# EAGLE board PLC.63001-Silo-Medium (EAGLE 9.6.2), part 1 of 2
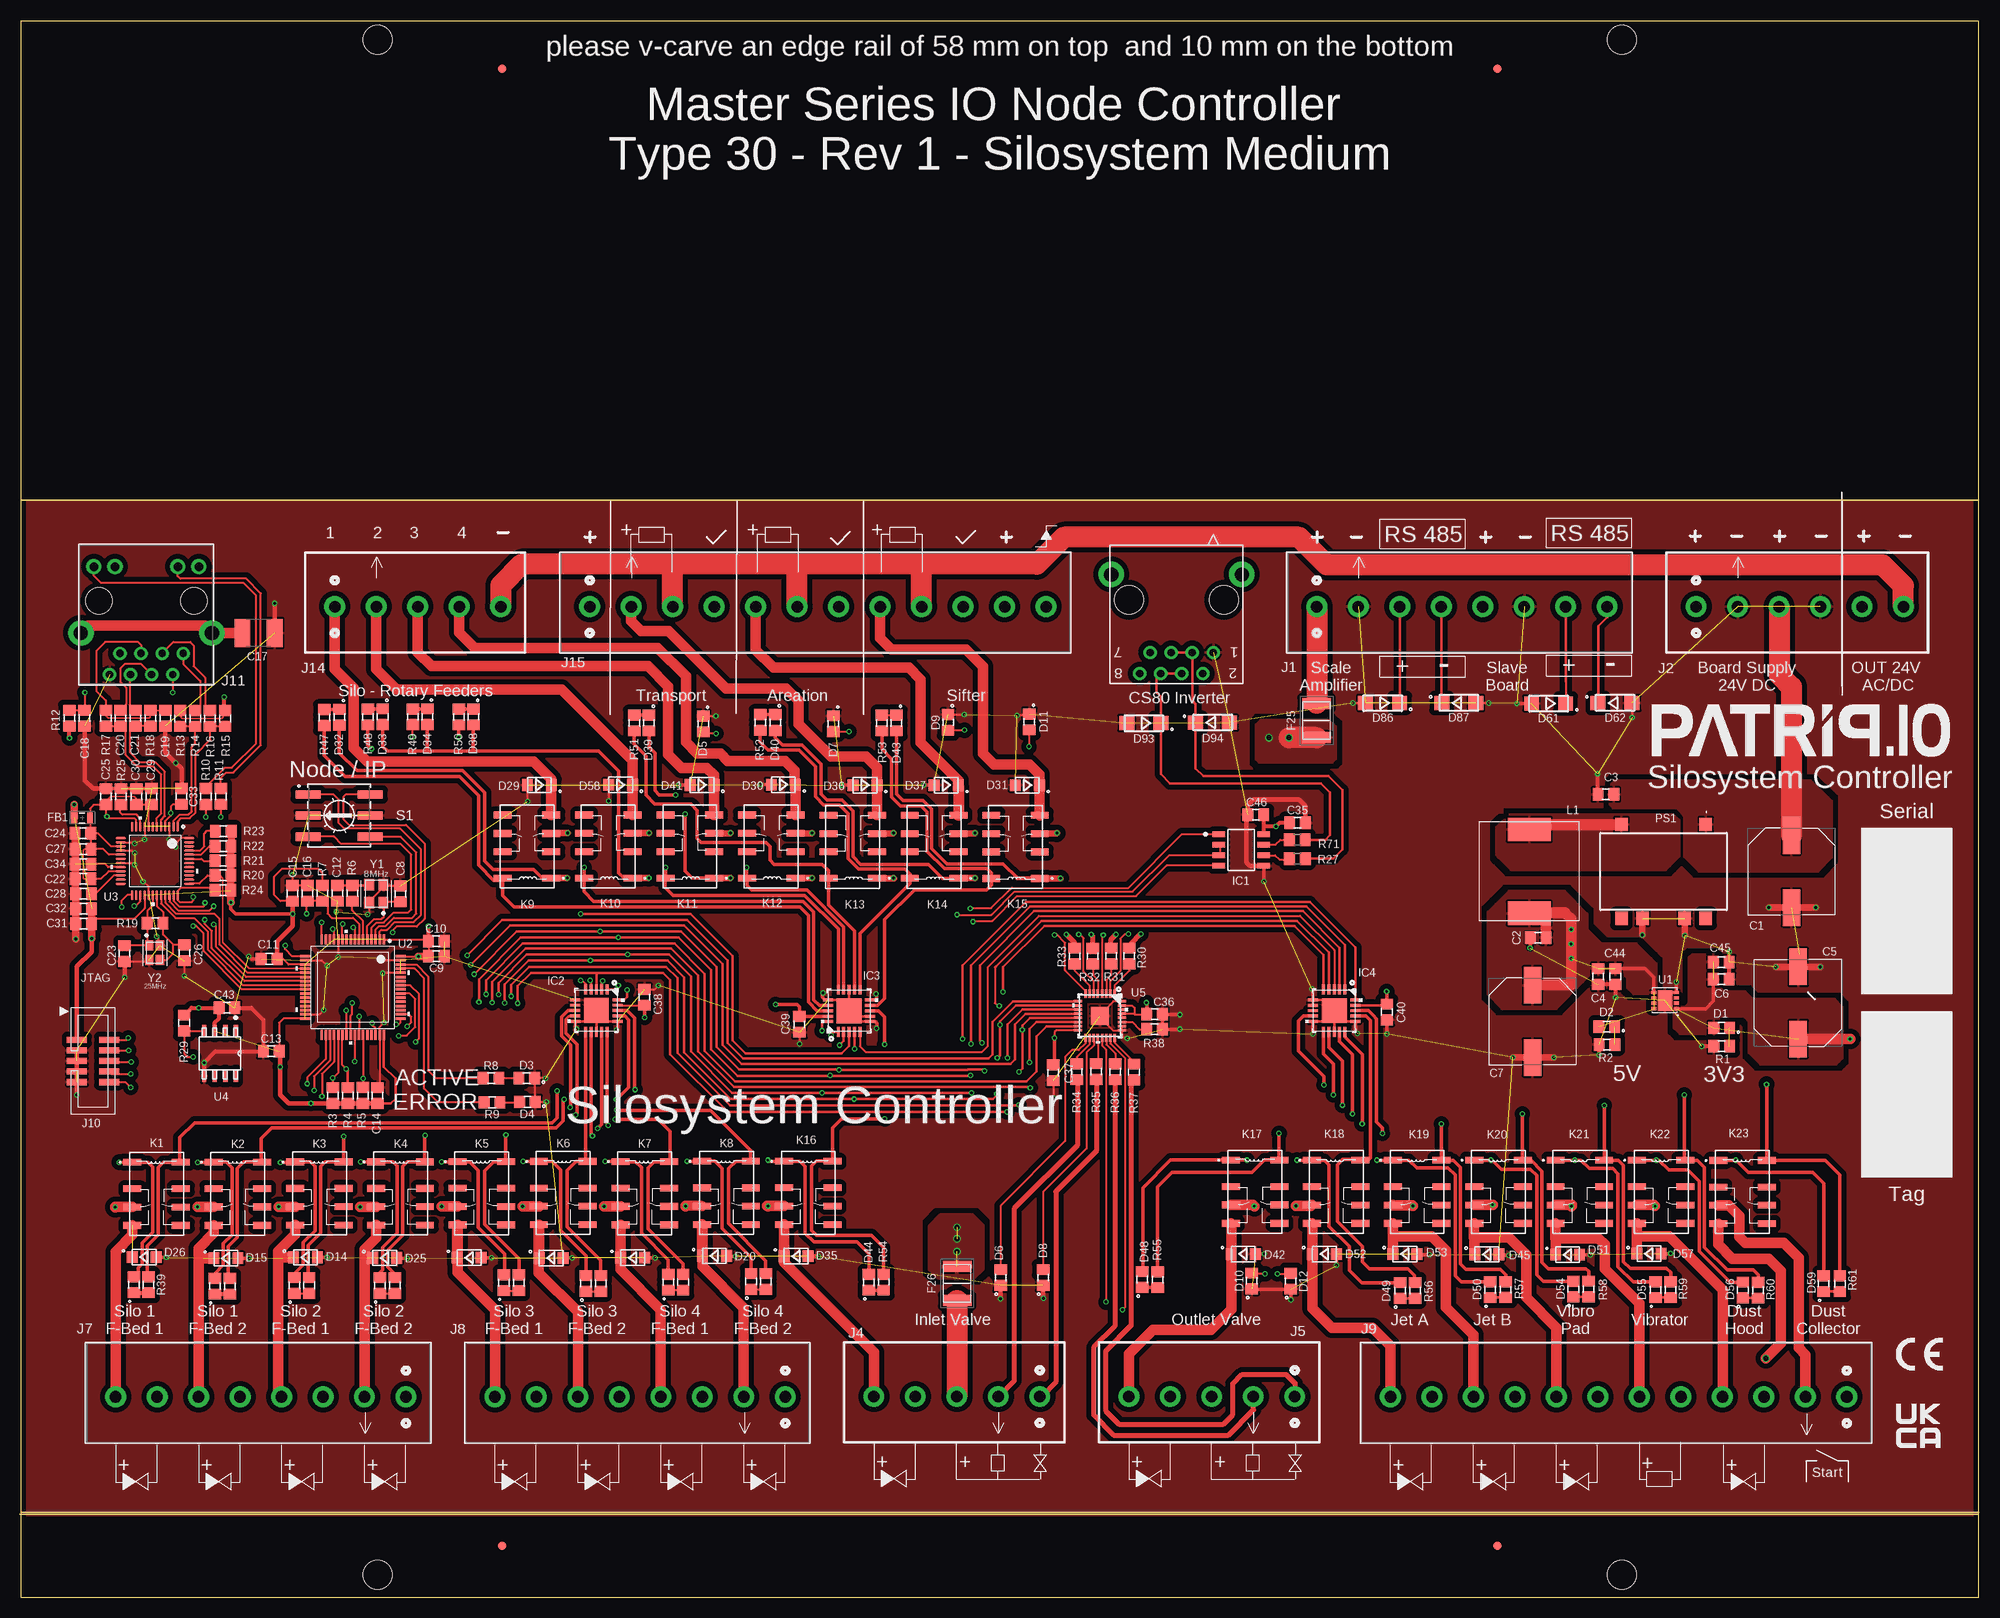
[diagram p0: board, top side]
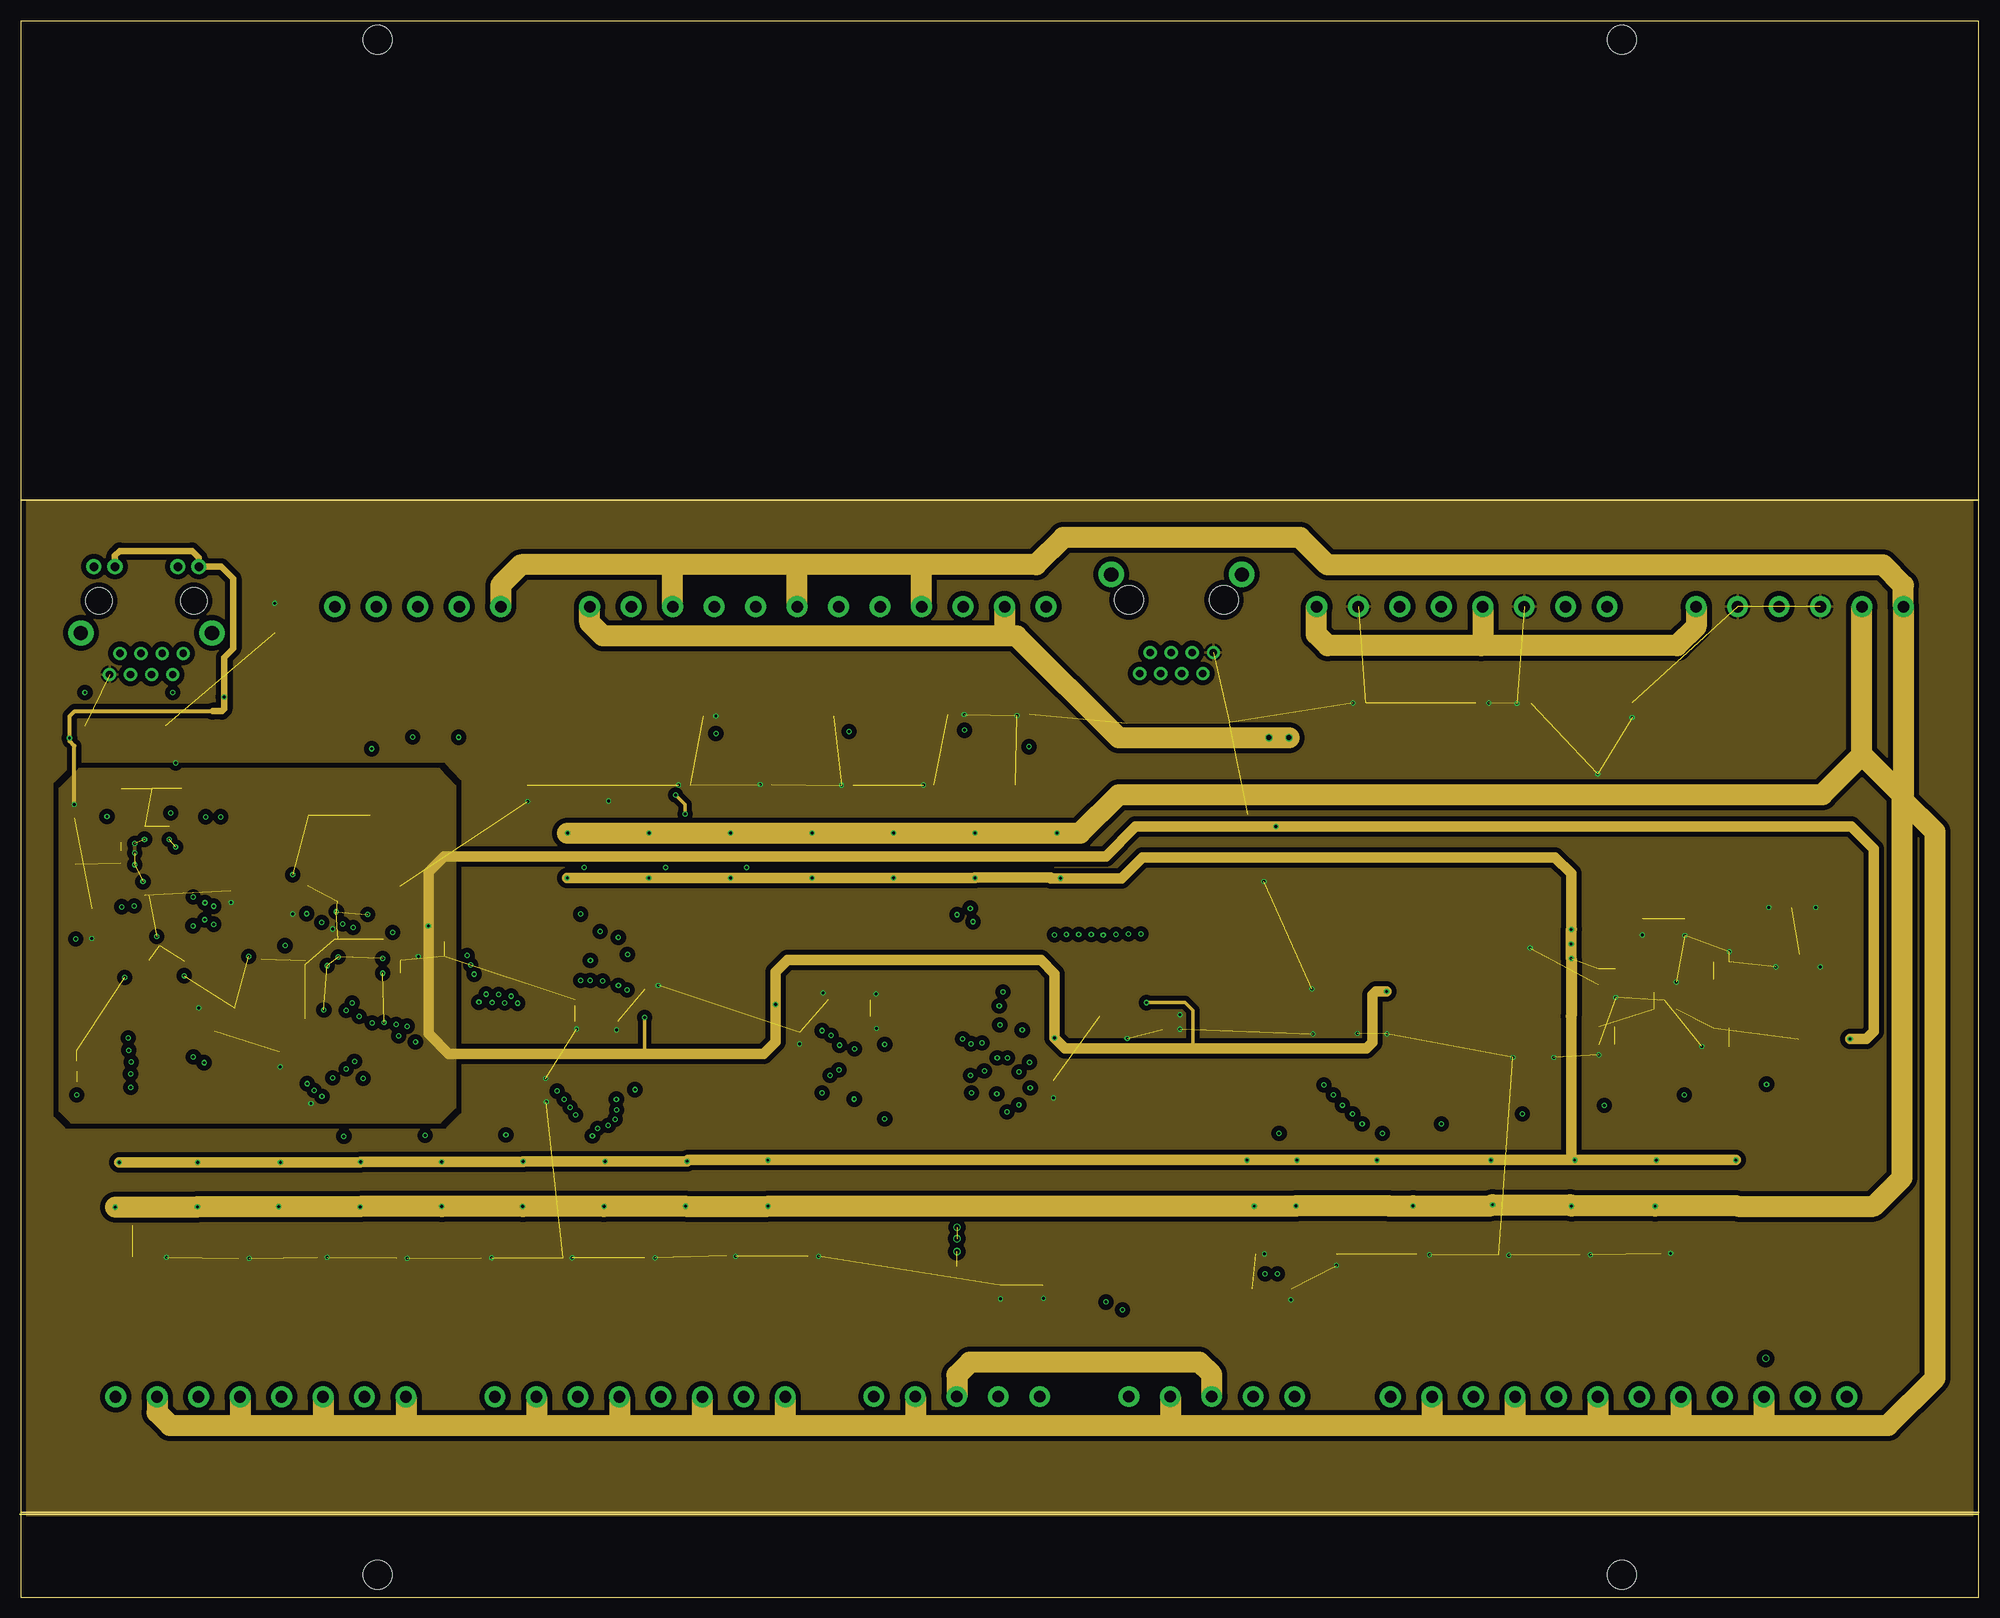
[diagram p1: board, inner layer Route2]
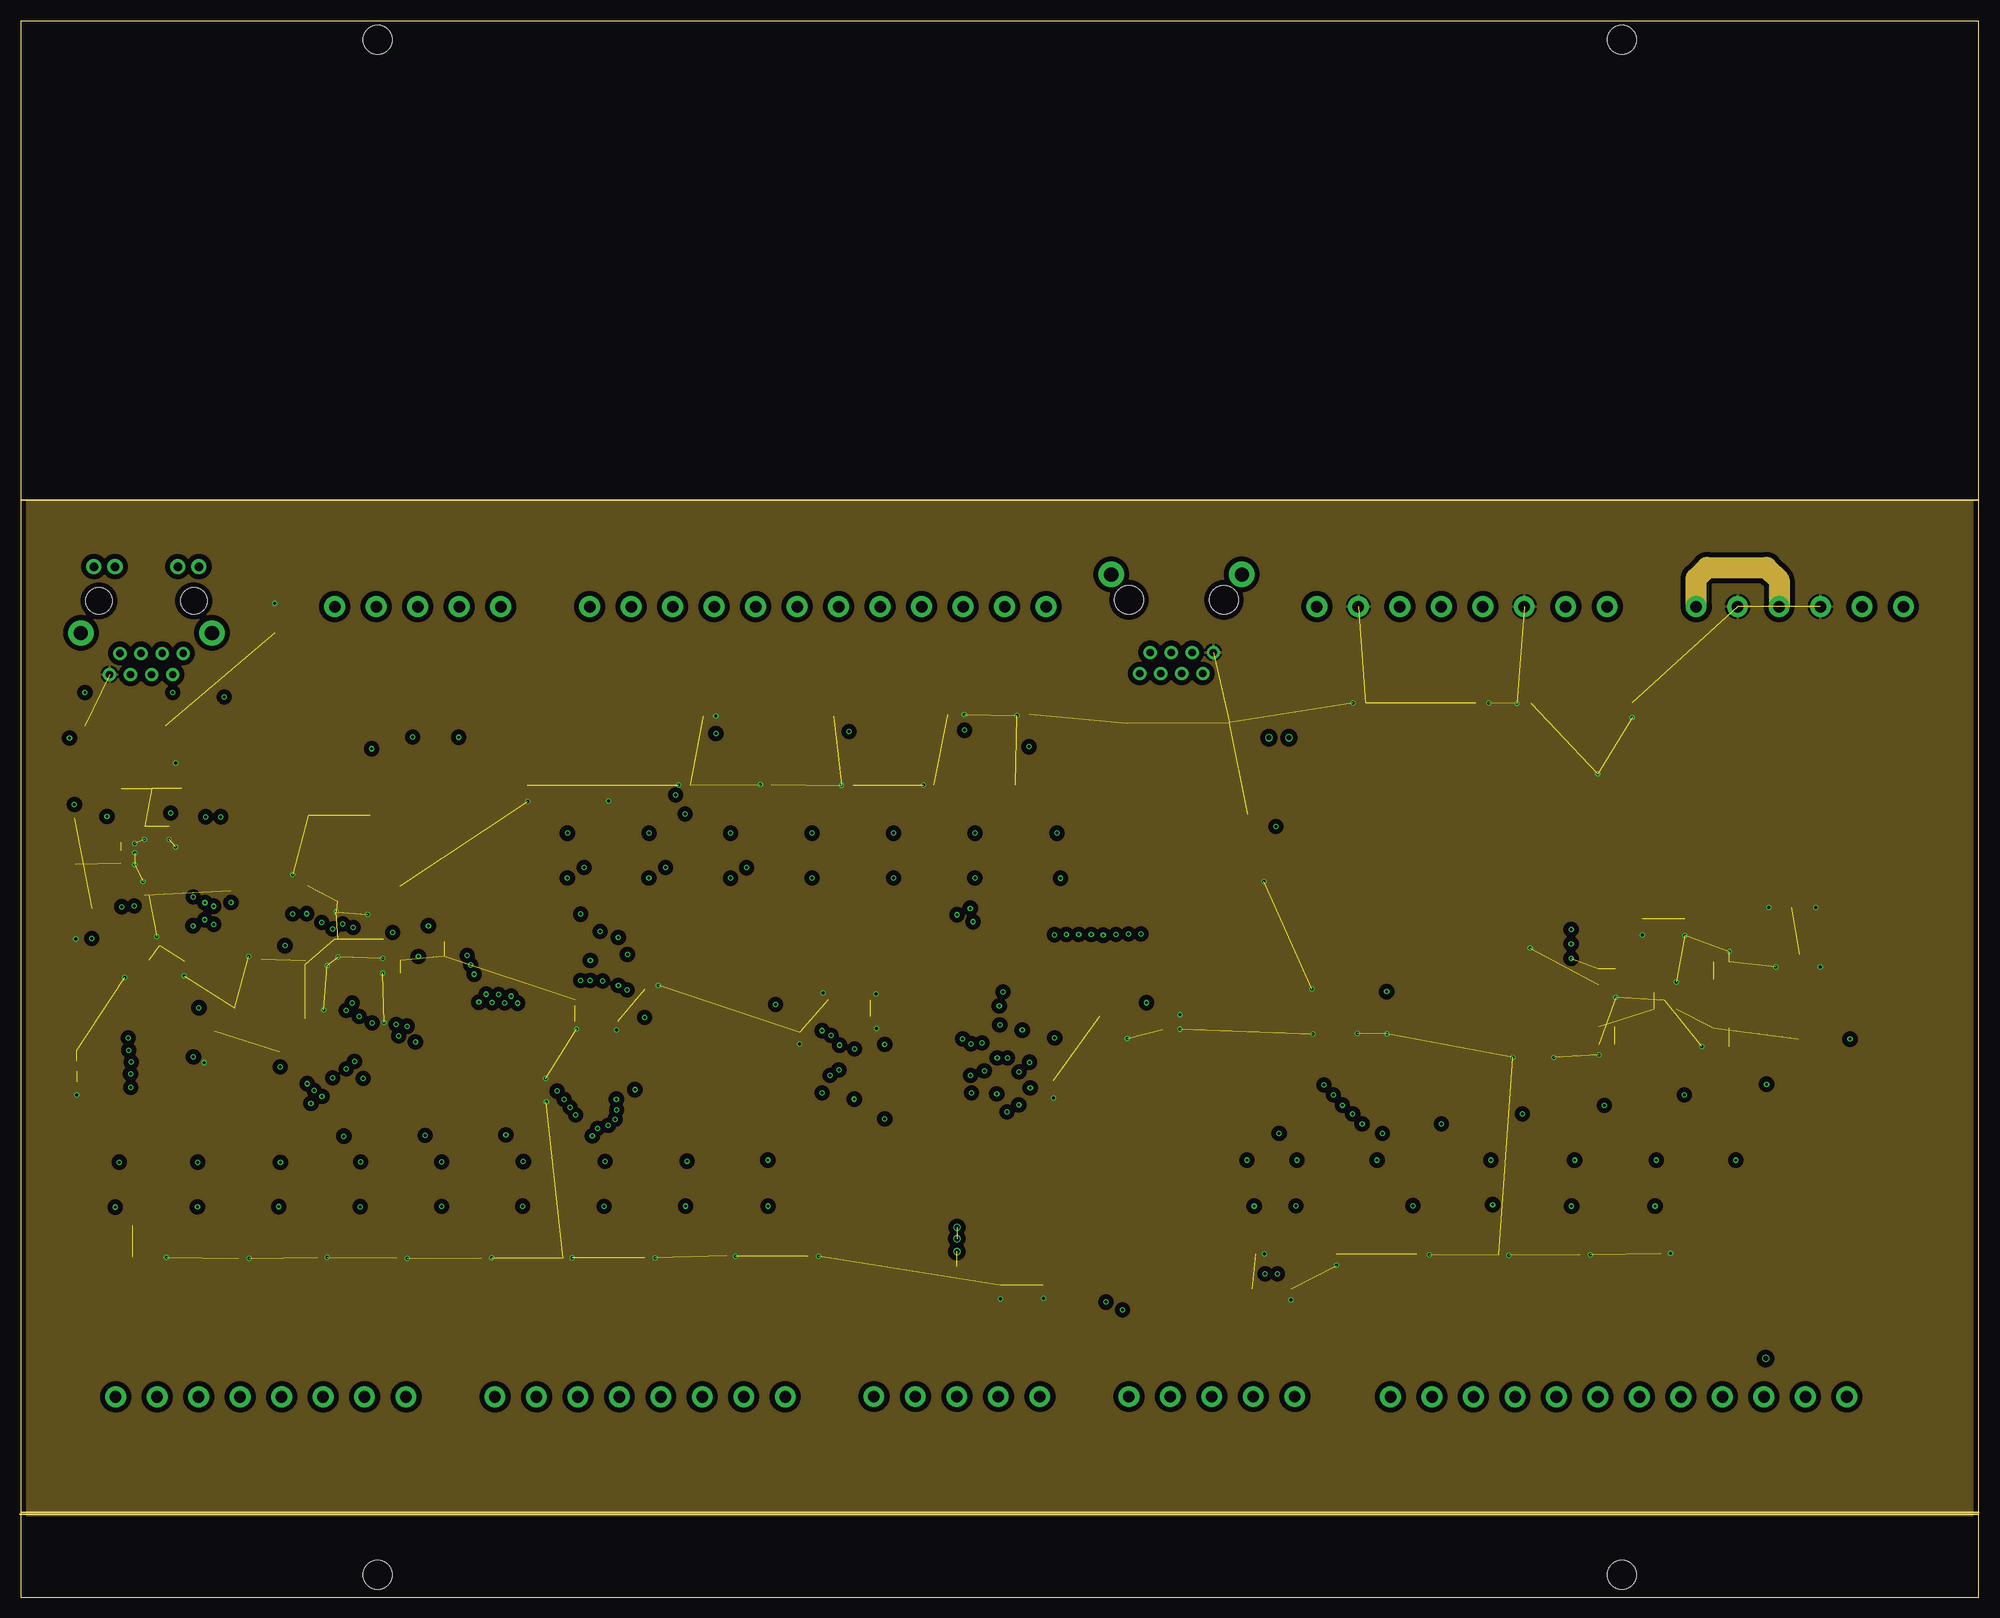
[diagram p2: board, inner layer Route15]
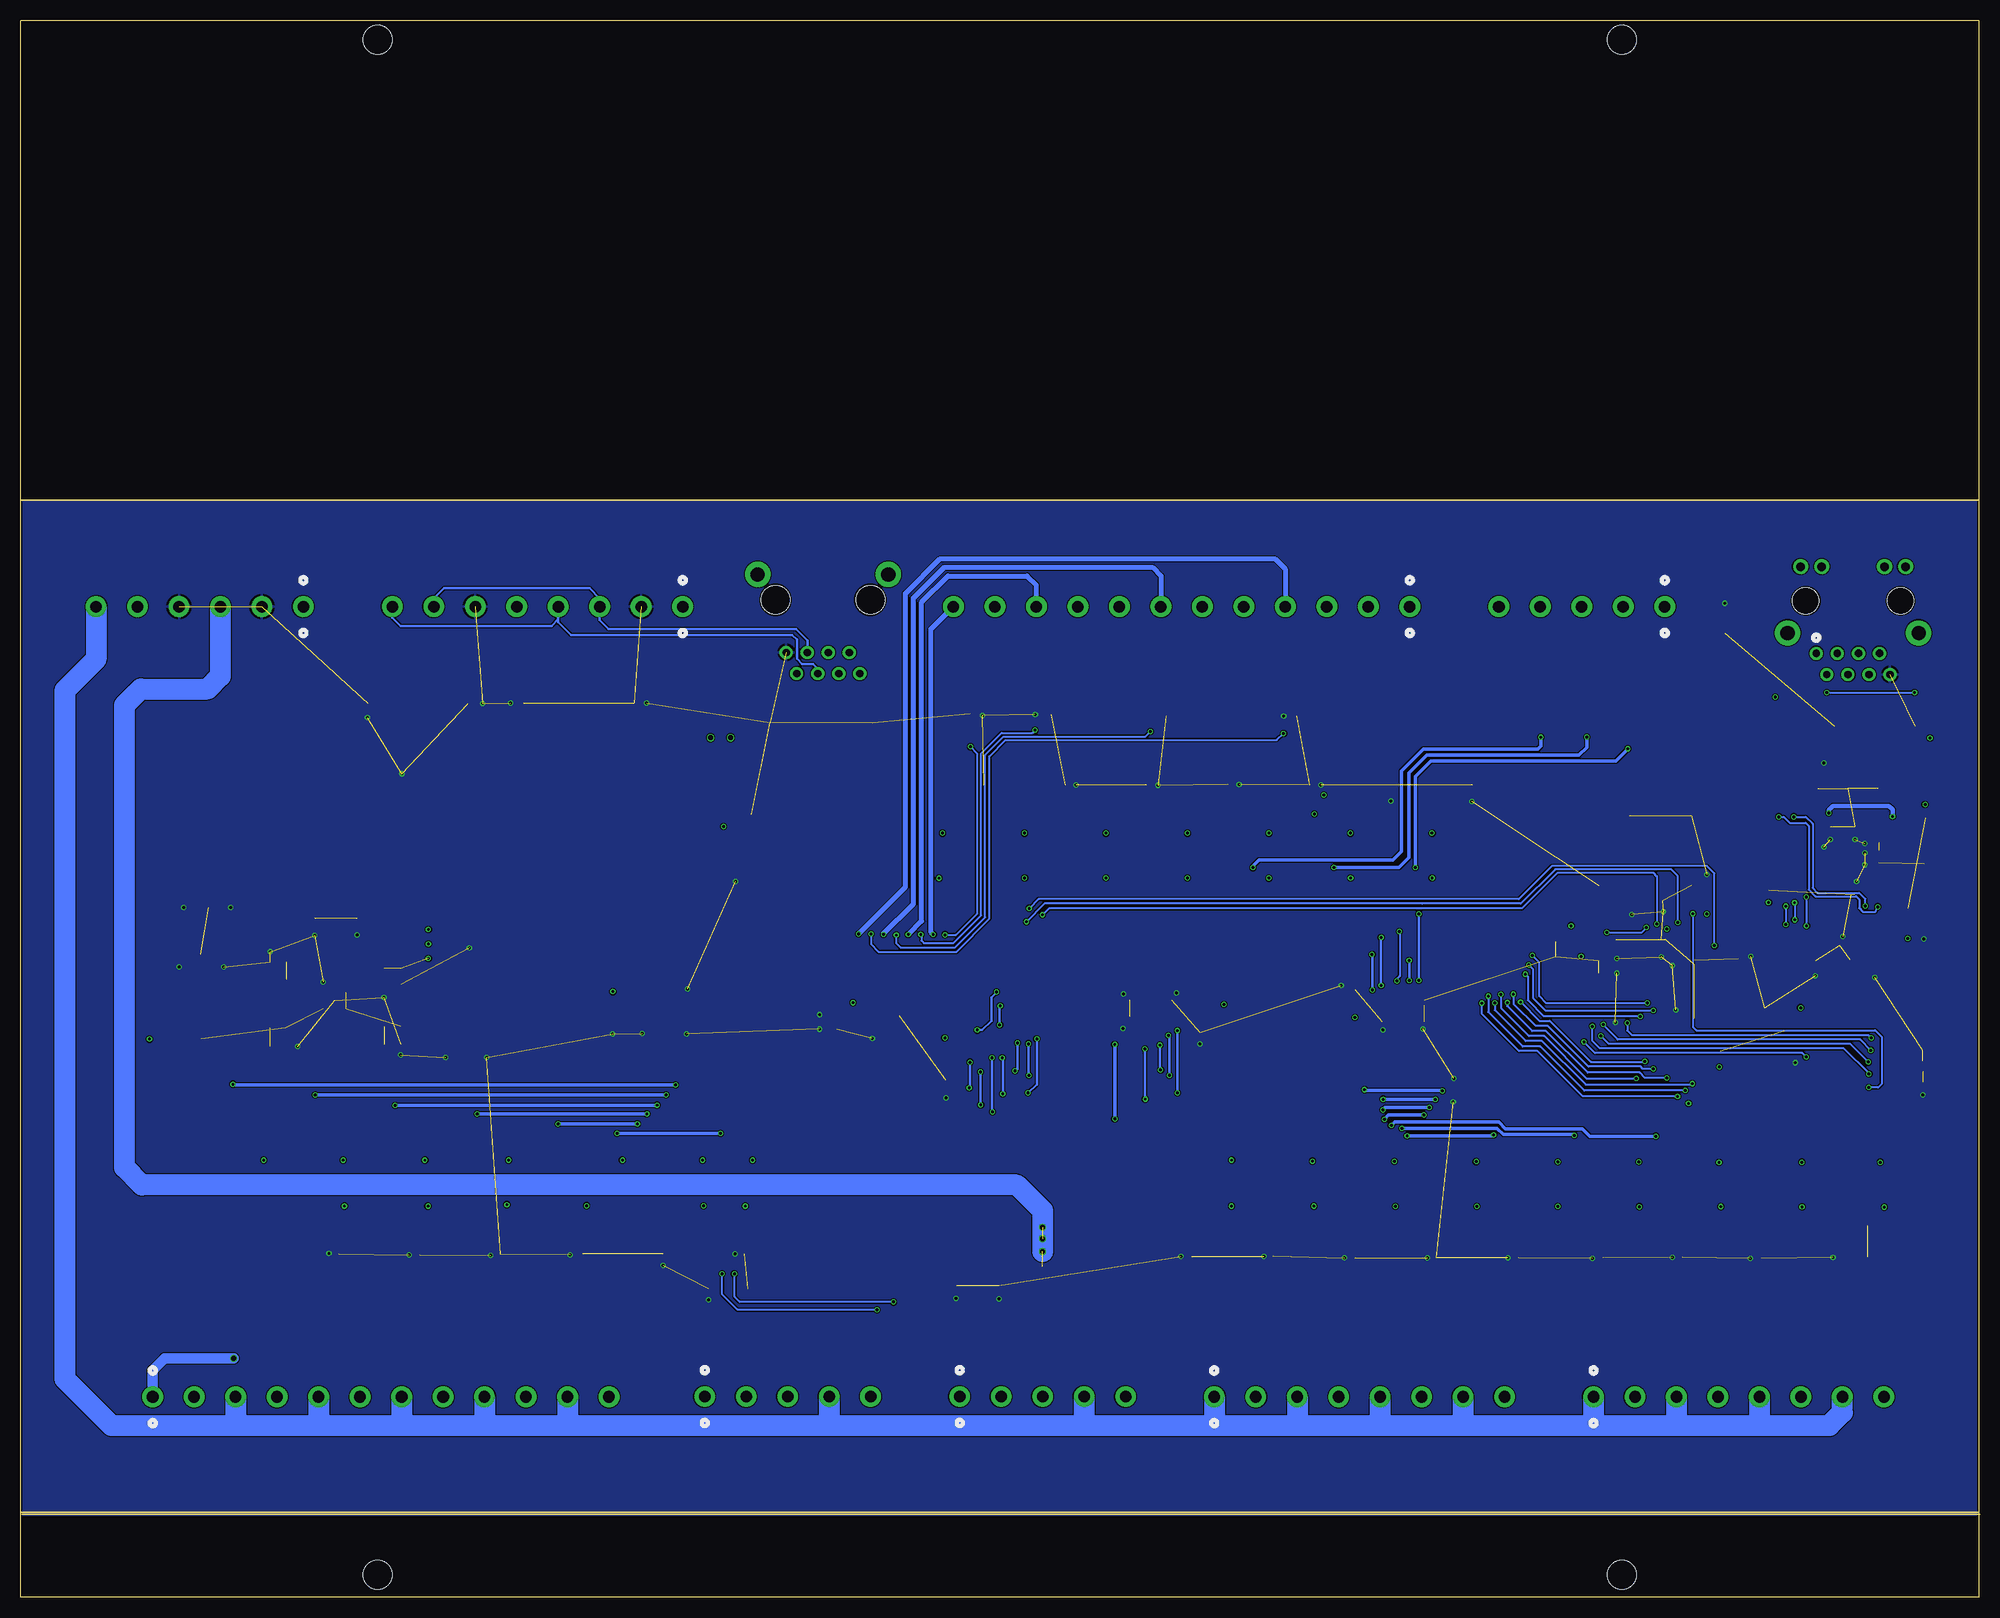
[diagram p3: board, bottom side, seen from below]

Size 236 x 190 mm. Coordinates in mm from the lower left corner, seen from the top.
Outline: 0,0 236,0 236,190 0,190 0,0
Copper layers (1+2*15+16): Top 0.035mm / dielectric 0.2mm / Route2 0.0175mm / dielectric 1.065mm / Route15 0.0175mm / dielectric 0.2mm / Bottom 0.035mm
Design rules "jlcpcb-4layers": minimum track width 3.5mil, minimum drill 0.2mm, track to track 5mil, track to pad 0.2mm, pad to pad 5mil, via to via 0.5mm, smd to smd 5mil, copper to edge 0.2mm, drill to drill 6mil, minimum pad ring 10mil, minimum via ring 0.13mm, stop-mask expansion 0.05mm, vias tented up to drill 16mil, thermal gap 10mil
Net classes: 0 default: width 0.2 mm, clearance 0.15 mm; 1 GND: width 0.2 mm, clearance 0.15 mm; 2 LV: width 0.203 mm, clearance 0.15 mm; 3 NET: width 0.254 mm, clearance 0.1 mm; 4 230V: width 1.27 mm, clearance 1 mm; 5 24V: width 0.3 mm, clearance 0.2 mm
Milling: 3 lines

## Footprints (pad centres in the part's own frame; a part is rotated, then mirrored left to right if it is on the bottom)
CAPAE1030X1050N = smd 4.416 x 2.115: 1 4.353,0; 2 -4.353,0
C0805 = smd 1.3 x 1.5: 1 -0.95,0; 2 0.95,0
C1812 = smd 1.9 x 3.4: 1 -1.95,0; 2 1.95,0
L0805 = smd 1.3 x 1.5: A 0.95,0; C -0.95,0
SOD123FL = smd 1.3 x 1.4: A 1.45,0; C -1.45,0
DO214AC = smd 1.8 x 1.7: A 2.05,0; C -2.05,0
FUSC4632X75N = smd 1.32 x 3.43: 1 -2.06,0; 2 2.06,0
HANDHELDMAINBOARD2_0805L = smd 0.7 x 1.3: 1 -0.95,0; 2 0.95,0
SOIC127P600X175-8N = smd 0.65 x 1.525: 1 -1.905,-2.712; 2 -0.635,-2.712; 3 0.635,-2.712; 4 1.905,-2.712; 5 1.905,2.712; 6 0.635,2.712; 7 -0.635,2.712; 8 -1.905,2.712
QFN65P500X500X80-21N = smd 0.35 x 1.2: 1 -1.3,-2.55; 2 -0.65,-2.55; 3 0,-2.55; 4 0.65,-2.55; 5 1.3,-2.55; 11 1.3,2.55; 12 0.65,2.55; 13 0,2.55; 14 -0.65,2.55; 15 -1.3,2.55 | smd 1.2 x 0.35: 6 2.55,-1.3; 7 2.55,-0.65; 8 2.55,0; 9 2.55,0.65; 10 2.55,1.3; 16 -2.55,1.3; 17 -2.55,0.65; 18 -2.55,0; 19 -2.55,-0.65; 20 -2.55,-1.3 | smd 3 x 3: 21 0,0
CONN_08_OMN = drill 1.397 pad 1.905: 1 0,0; 2 5,0; 3 10,0; 4 15,0; 5 20,0; 6 25,0; 7 30,0; 8 35,0
CONN6_8000072438_WED = drill 1.397 pad 1.905: 1 0,0; 2 5,0; 3 10,0; 4 15,0; 5 20,0; 6 25,0
CONN_05_OMN_ROT = drill 1.397 pad 1.905: 1 0,0; 2 5,0; 3 10,0; 4 15,0; 5 20,0
CONN_08_OMN_ROT = drill 1.397 pad 1.905: 1 0,0; 2 5,0; 3 10,0; 4 15,0; 5 20,0; 6 25,0; 7 30,0; 8 35,0
CONN12_8000072470_WED_ROT = drill 1.397 pad 1.905: 1 0,0; 2 5.004,0; 3 10.008,0; 4 15.011,0; 5 19.99,0; 6 24.994,0; 7 29.997,0; 8 35.001,0; 9 40.005,0; 10 45.009,0; 11 50.013,0; 12 54.991,0
2X05_1.27MM_BOX_NOPOSTS = smd 0.76 x 2.4: 1 -2.54,-1.95; 2 -2.54,1.95; 3 -1.27,-1.95; 4 -1.27,1.95; 5 0,-1.95; 6 0,1.95; 7 1.27,-1.95; 8 1.27,1.95; 9 2.54,-1.95; 10 2.54,1.95
CONN14_2562150000_WED = drill 0.889 pad 1.397: 1 0,0; 2 1.27,2.54; 3 2.54,0; 4 3.81,2.54; 5 5.08,0; 6 6.35,2.54; 7 7.62,0; 8 8.89,2.54 | drill 1.016 pad 1.524: 11 10.77,-10.465; 12 8.23,-10.465; 13 0.66,-10.465; 14 -1.88,-10.465 | drill 1.702 pad 2.21: 15 -3.454,-2.464; 16 12.344,-2.464 | hole 3.2: -1.27,-6.35; 10.16,-6.35
CONN8_2562970000_WED = drill 0.889 pad 1.397: 1 0,-2.54; 2 1.27,0; 3 2.54,-2.54; 4 3.81,0; 5 5.08,-2.54; 6 6.35,0; 7 7.62,-2.54; 8 8.89,0 | drill 1.702 pad 2.21: 12 12.319,-11.938; 13 -3.429,-11.938 | hole 3.5: -1.27,-8.89; 10.16,-8.89
CONN_05_OMN = drill 1.397 pad 1.905: 1 0,0; 2 5,0; 3 10,0; 4 15,0; 5 20,0
CONN12_8000072470_WED = drill 1.397 pad 1.905: 1 0,0; 2 5,0; 3 10,0; 4 15,0; 5 20,0; 6 25,0; 7 30,0; 8 35,0; 9 40,0; 10 45,0; 11 50,0; 12 55,0
HFD45S = smd 0.8 x 2.15: 1 -3.81,-2.929; 2 -0.61,-2.929; 3 1.59,-2.929; 4 3.81,-2.929; 5 3.81,2.921; 6 1.59,2.921; 7 -0.61,2.921; 8 -3.81,2.921
INDPM120120X100N = smd 5.2 x 2.8: 1 0,5.05; 2 0,-5.05
TSR124120SM = smd 1.5 x 1.61: 1 -5.08,-5.655; 5 5.08,-5.655; 6 5.08,5.655; 7 2.54,5.655; 9 -2.54,5.655; 10 -5.08,5.655
R0805 = smd 1.3 x 1.5: 1 -0.95,0; 2 0.95,0
42854232081X_10POS = smd 1 x 3: 1 -2.54,-3.75; 2 2.54,3.75; 4 2.54,-3.75; 8 -2.54,3.75; C1 0,-3.75; C2 0,3.75
NCV8165ML330TBG = smd 0.4 x 0.58: 1 -0.975,-1.36; 2 -0.325,-1.36; 3 0.325,-1.36; 4 0.975,-1.36; 5 0.975,1.36; 6 0.325,1.36; 7 -0.325,1.36; 8 -0.975,1.36 | smd 2.5 x 1.75: 9 0,0
ST_MICROELECTRONICS_STM32F103RBT6_0 = smd 0.3 x 1.2: 1 -3.75,-5.75; 2 -3.25,-5.75; 3 -2.75,-5.75; 4 -2.25,-5.75; 5 -1.75,-5.75; 6 -1.25,-5.75; 7 -0.75,-5.75; 8 -0.25,-5.75; 9 0.25,-5.75; 10 0.75,-5.75; 11 1.25,-5.75; 12 1.75,-5.75; 13 2.25,-5.75; 14 2.75,-5.75; 15 3.25,-5.75; 16 3.75,-5.75; 33 3.75,5.75; 34 3.25,5.75; 35 2.75,5.75; 36 2.25,5.75; 37 1.75,5.75; 38 1.25,5.75; 39 0.75,5.75; 40 0.25,5.75; 41 -0.25,5.75; 42 -0.75,5.75; 43 -1.25,5.75; 44 -1.75,5.75; 45 -2.25,5.75; 46 -2.75,5.75; 47 -3.25,5.75; 48 -3.75,5.75 | smd 1.2 x 0.3: 17 5.75,-3.75; 18 5.75,-3.25; 19 5.75,-2.75; 20 5.75,-2.25; 21 5.75,-1.75; 22 5.75,-1.25; 23 5.75,-0.75; 24 5.75,-0.25; 25 5.75,0.25; 26 5.75,0.75; 27 5.75,1.25; 28 5.75,1.75; 29 5.75,2.25; 30 5.75,2.75; 31 5.75,3.25; 32 5.75,3.75; 49 -5.75,3.75; 50 -5.75,3.25; 51 -5.75,2.75; 52 -5.75,2.25; 53 -5.75,1.75; 54 -5.75,1.25; 55 -5.75,0.75; 56 -5.75,0.25; 57 -5.75,-0.25; 58 -5.75,-0.75; 59 -5.75,-1.25; 60 -5.75,-1.75; 61 -5.75,-2.25; 62 -5.75,-2.75; 63 -5.75,-3.25; 64 -5.75,-3.75
WIZNET_W5500_0 = smd 0.25 x 1.25: 1 -2.75,-4.125; 2 -2.25,-4.125; 3 -1.75,-4.125; 4 -1.25,-4.125; 5 -0.75,-4.125; 6 -0.25,-4.125; 7 0.25,-4.125; 8 0.75,-4.125; 9 1.25,-4.125; 10 1.75,-4.125; 11 2.25,-4.125; 12 2.75,-4.125; 25 2.75,4.125; 26 2.25,4.125; 27 1.75,4.125; 28 1.25,4.125; 29 0.75,4.125; 30 0.25,4.125; 31 -0.25,4.125; 32 -0.75,4.125; 33 -1.25,4.125; 34 -1.75,4.125; 35 -2.25,4.125; 36 -2.75,4.125 | smd 1.25 x 0.25: 13 4.125,-2.75; 14 4.125,-2.25; 15 4.125,-1.75; 16 4.125,-1.25; 17 4.125,-0.75; 18 4.125,-0.25; 19 4.125,0.25; 20 4.125,0.75; 21 4.125,1.25; 22 4.125,1.75; 23 4.125,2.25; 24 4.125,2.75; 37 -4.125,2.75; 38 -4.125,2.25; 39 -4.125,1.75; 40 -4.125,1.25; 41 -4.125,0.75; 42 -4.125,0.25; 43 -4.125,-0.25; 44 -4.125,-0.75; 45 -4.125,-1.25; 46 -4.125,-1.75; 47 -4.125,-2.25; 48 -4.125,-2.75
21-0041B_8_MXM = smd 0.533 x 1.46: 1 -1.905,-2.724; 2 -0.635,-2.724; 3 0.635,-2.724; 4 1.905,-2.724; 5 1.905,2.724; 6 0.635,2.724; 7 -0.635,2.724; 8 -1.905,2.724
21-0140_T3255+6_MXM = smd 0.3 x 1: 1 -1.75,-2.654; 2 -1.25,-2.654; 3 -0.75,-2.654; 4 -0.25,-2.654; 5 0.25,-2.654; 6 0.75,-2.654; 7 1.25,-2.654; 8 1.75,-2.654; 17 1.75,2.654; 18 1.25,2.654; 19 0.75,2.654; 20 0.25,2.654; 21 -0.25,2.654; 22 -0.75,2.654; 23 -1.25,2.654; 24 -1.75,2.654 | smd 1 x 0.3: 9 2.654,-1.75; 10 2.654,-1.25; 11 2.654,-0.75; 12 2.654,-0.25; 13 2.654,0.25; 14 2.654,0.75; 15 2.654,1.25; 16 2.654,1.75; 25 -2.654,1.75; 26 -2.654,1.25; 27 -2.654,0.75; 28 -2.654,0.25; 29 -2.654,-0.25; 30 -2.654,-0.75; 31 -2.654,-1.25; 32 -2.654,-1.75 | smd 2.2 x 2.2: 33 0,0
_THL_VP = smd 1 x 1: 1 -60,1; 2 60,1; 3 60,179; 4 -60,179 | hole 3.5: -75,-2.5; 75,-2.5; -75,182.5; 75,182.5
4-SMD3.2X2.5MM,NOLEAD = smd 1.4 x 1.2: 1 -1.1,-0.85; 2 1.1,-0.85; 3 1.1,0.85; 4 -1.1,0.85
ECS2501836B2CTYTR = smd 1.2 x 1: 1 -0.85,-0.65; 2 0.85,-0.65; 3 0.85,0.65; 4 -0.85,0.65

## Placement (x,y rotation side)
C1  C-220U-10X10  [CAPAE1030X1050N]  213.42,87.45 90 top
C2  C-1U-0805  [C0805]  182.89,79.47 180 top
C3  C-100N-0805  [C0805]  191.06,96.76 180 top
C4  C-100N-0805  [C0805]  190.13,74.79 270 top
C5  C-220U-10X10  [CAPAE1030X1050N]  214.23,71.61 270 top
C6  C-1U-0805  [C0805]  204.96,74.45 0 top
C7  C-220U-10X10  [CAPAE1030X1050N]  182.22,69.38 90 top
C8  C-18P-0805  [C0805]  45.76,84.75 90 top
C9  C-100N-0805  [C0805]  50.1,77.23 0 top
C10  C-100N-0805  [C0805]  50.09,79.03 0 top
C11  C-100N-0805  [C0805]  29.94,76.91 180 top
C12  C-18P-0805  [C0805]  38.16,84.82 270 top
C13  C-100N-0805  [C0805]  30.19,65.77 180 top
C14  C-100N-0805  [C0805]  43,60.45 90 top
C15  C-10U-0805  [C0805]  32.77,84.82 90 top
C16  C-1U-0805  [C0805]  34.57,84.81 90 top
C17  C-1N-1812  [C1812]  28.66,116.19 180 top
C18  C-22N-0805  [C0805]  7.7,105.93 90 top
C19  C-10N-0805  [C0805]  17.42,105.92 270 top
C20  C-68N-0805  [C0805]  12,105.93 90 top
C21  C-68N-0805  [C0805]  13.81,105.93 90 top
C22  C-1U-0805  [C0805]  7.51,86.56 180 top
C23  C-18P-0805  [C0805]  12.5,77.56 270 top
C24  C-1U-0805  [C0805]  7.5,92.05 180 top
C25  C-1U-0805  [C0805]  10.25,96.48 90 top
C26  C-18P-0805  [C0805]  19.72,77.65 270 top
C27  C-1U-0805  [C0805]  7.52,90.16 180 top
C28  C-10N-0805  [C0805]  7.57,84.76 180 top
C29  C-1U-0805  [C0805]  15.77,96.49 90 top
C30  C-1U-0805  [C0805]  13.94,96.48 90 top
C31  C-1U-0805  [C0805]  7.59,81.18 180 top
C32  C-10U-0805  [C0805]  7.58,82.98 180 top
C33  C-10U-0805  [C0805]  19.38,96.52 90 top
C34  C-4U7-0805  [C0805]  7.52,88.33 180 top
C35  C-100N-0805  [C0805]  153.9,93.31 0 top
C36  C-100N-0805  [C0805]  136.67,70.23 0 top
C37  C-1U-0805  [C0805]  124.46,63.19 270 top
C38  C-100N-0805  [C0805]  75.18,72.29 90 top
C39  C-100N-0805  [C0805]  93.86,69.03 270 top
C40  C-100N-0805  [C0805]  164.66,70.51 270 top
C43  C-100N-0805  [C0805]  24.85,71.03 180 top
C44  C-100N-0805  [C0805]  192.2,74.79 270 top
C45  C-100N-0805  [C0805]  204.96,76.53 0 top
C46  C-4U7-0805  [C0805]  148.85,94.29 180 top
D1  LED-GREEN-0805  [L0805]  205.01,68.6 180 top
D2  LED-GREEN-0805  [L0805]  191.16,68.77 180 top
D3  LED-BLUE-0805  [L0805]  60.98,62.55 180 top
D4  LED-RED-0805  [L0805]  61.06,59.68 180 top
D5  LED-RED-0805  [L0805]  82.27,105.25 270 top
D6  LED-GREEN-0805  [L0805]  118.09,38.5 90 top
D7  LED-RED-0805  [L0805]  97.96,105.27 270 top
D8  LED-GREEN-0805  [L0805]  123.22,38.51 90 top
D9  LED-RED-0805  [L0805]  111.77,105.43 270 top
D10  LED-GREEN-0805  [L0805]  148.39,38.09 90 top
D11  LED-GREEN-0805  [L0805]  121.56,105.5 270 top
D12  LED-GREEN-0805  [L0805]  153.08,38.08 90 top
D13  SMAJ30CA  [SOD123FL]  63.92,40.86 0 top
D14  SMAJ30CA  [SOD123FL]  34.3,40.95 0 top
D15  SMAJ30CA  [SOD123FL]  24.73,40.84 0 top
D16  LED-GREEN-0805  [L0805]  13.64,37.64 90 top
D17  LED-GREEN-0805  [L0805]  23.41,37.47 90 top
D18  LED-GREEN-0805  [L0805]  32.99,37.55 90 top
D19  SMAJ30CA  [SOD123FL]  54.05,40.89 0 top
D20  SMAJ30CA  [SOD123FL]  83.61,41.12 0 top
D21  SMAJ30CA  [SOD123FL]  73.75,40.9 0 top
D22  LED-GREEN-0805  [L0805]  43.29,37.55 90 top
D23  LED-GREEN-0805  [L0805]  58.24,37.87 90 top
D24  LED-GREEN-0805  [L0805]  68.13,37.8 90 top
D25  SMAJ30CA  [SOD123FL]  43.87,40.88 0 top
D26  SMAJ30CA  [SOD123FL]  14.87,40.97 0 top
D27  LED-GREEN-0805  [L0805]  78.05,37.95 90 top
D28  LED-GREEN-0805  [L0805]  88.03,38.04 90 top
D29  SMAJ30CA  [SOD123FL]  62.5,97.88 180 top
D30  SMAJ30CA  [SOD123FL]  91.92,97.92 180 top
D31  SMAJ30CA  [SOD123FL]  121.33,97.85 180 top
D32  LED-GREEN-0805  [L0805]  38.39,106.06 270 top
D33  LED-GREEN-0805  [L0805]  43.62,106.11 270 top
D34  LED-GREEN-0805  [L0805]  49.01,106.11 270 top
D35  SMAJ30CA  [SOD123FL]  93.46,41.09 0 top
D36  SMAJ30CA  [SOD123FL]  101.77,97.87 180 top
D37  SMAJ30CA  [SOD123FL]  111.54,97.86 180 top
D38  LED-GREEN-0805  [L0805]  54.56,106.1 270 top
D39  LED-GREEN-0805  [L0805]  75.72,105.38 270 top
D40  LED-GREEN-0805  [L0805]  90.92,105.41 270 top
D41  SMAJ30CA  [SOD123FL]  82.12,97.88 180 top
D42  SMAJ30CA  [SOD123FL]  147.35,41.35 0 top
D43  LED-GREEN-0805  [L0805]  105.54,105.35 270 top
D44  LED-GREEN-0805  [L0805]  102.22,37.94 90 top
D45  SMAJ30CA  [SOD123FL]  176.72,41.3 0 top
D48  LED-GREEN-0805  [L0805]  135.18,38.27 90 top
D49  LED-GREEN-0805  [L0805]  166.23,36.94 90 top
D50  LED-GREEN-0805  [L0805]  177.13,37.04 90 top
D51  SMAJ30CA  [SOD123FL]  186.45,41.25 0 top
D52  SMAJ30CA  [SOD123FL]  157.13,41.35 0 top
D53  SMAJ30CA  [SOD123FL]  166.83,41.34 0 top
D54  LED-GREEN-0805  [L0805]  187.14,37.12 90 top
D55  LED-GREEN-0805  [L0805]  197.03,37.04 90 top
D56  LED-GREEN-0805  [L0805]  207.56,37 90 top
D57  SMAJ30CA  [SOD123FL]  196.25,41.37 0 top
D58  SMAJ30CA  [SOD123FL]  72.3,97.89 180 top
D59  LED-GREEN-0805  [L0805]  217.31,37.77 90 top
D61  SMAJ30CA  [DO214AC]  184.15,107.71 180 top
D62  SMAJ30CA  [DO214AC]  192.16,107.75 0 top
D86  SMAJ30CA  [DO214AC]  164.15,107.77 180 top
D87  SMAJ30CA  [DO214AC]  173.34,107.76 0 top
D93  SMAJ30CA  [DO214AC]  135.37,105.34 180 top
D94  SMAJ30CA  [DO214AC]  143.66,105.4 0 top
F25  F-1500MA  [FUSC4632X75N]  156.18,105.65 90 top
F26  F-1500MA  [FUSC4632X75N]  112.86,37.8 90 top
FB1  FB-120R  [HANDHELDMAINBOARD2_0805L]  7.4,93.91 180 top
IC1  MAX-3486  [SOIC127P600X175-8N]  147.12,90.04 270 top
IC2  MAX-4896  [QFN65P500X500X80-21N]  69.38,70.68 180 top
IC3  MAX-4896  [QFN65P500X500X80-21N]  99.84,70.65 0 top
IC4  MAX-4896  [QFN65P500X500X80-21N]  158.31,70.68 180 top
J1  OMN_5_08  [CONN_08_OMN]  156.21,119.38 0 top
J2  OMN_5_06  [CONN6_8000072438_WED]  201.93,119.38 0 top
J4  OMN_5_05  [CONN_05_OMN_ROT]  102.82,24.16 0 top
J5  OMN_5_05  [CONN_05_OMN_ROT]  133.55,24.16 0 top
J7  OMN_5_08  [CONN_08_OMN_ROT]  11.43,24.13 0 top
J8  OMN_5_08  [CONN_08_OMN_ROT]  57.15,24.13 0 top
J9  OMN_5_12  [CONN12_8000072470_WED_ROT]  165.1,24.13 0 top
J10  IDC-10-HP  [2X05_1.27MM_BOX_NOPOSTS]  8.71,64.61 270 top
J11  NET-MAG-LED_THR_180  [CONN14_2562150000_WED]  19.59,113.73 180 top
J13  NET-THR_180  [CONN8_2562970000_WED]  143.75,111.31 180 top
J14  OMN_5_05  [CONN_05_OMN]  37.85,119.38 0 top
J15  OMN_5_12  [CONN12_8000072470_WED]  68.58,119.38 0 top
K1  HFD4-5  [HFD45S]  16.38,48.61 270 top
K2  HFD4-5  [HFD45S]  26.17,48.61 270 top
K3  HFD4-5  [HFD45S]  36.01,48.64 270 top
K4  HFD4-5  [HFD45S]  45.79,48.64 270 top
K5  HFD4-5  [HFD45S]  55.57,48.66 270 top
K6  HFD4-5  [HFD45S]  65.38,48.7 270 top
K7  HFD4-5  [HFD45S]  75.22,48.67 270 top
K8  HFD4-5  [HFD45S]  85.07,48.71 270 top
K9  HFD4-5  [HFD45S]  61.01,90.45 90 top
K10  HFD4-5  [HFD45S]  70.81,90.46 90 top
K11  HFD4-5  [HFD45S]  80.64,90.46 90 top
K12  HFD4-5  [HFD45S]  90.45,90.46 90 top
K13  HFD4-5  [HFD45S]  100.28,90.43 90 top
K14  HFD4-5  [HFD45S]  110.08,90.43 90 top
K15  HFD4-5  [HFD45S]  119.9,90.42 90 top
K16  HFD4-5  [HFD45S]  94.93,48.72 270 top
K17  HFD4-5  [HFD45S]  148.79,48.85 270 top
K18  HFD4-5  [HFD45S]  158.56,48.84 270 top
K19  HFD4-5  [HFD45S]  168.32,48.84 270 top
K20  HFD4-5  [HFD45S]  178.12,48.84 270 top
K21  HFD4-5  [HFD45S]  187.92,48.84 270 top
K22  HFD4-5  [HFD45S]  197.73,48.84 270 top
K23  HFD4-5  [HFD45S]  207.53,48.81 270 top
L1  ID-100UH  [INDPM120120X100N]  181.82,87.47 0 top
PS1  TSR1-2450SM  [TSR124120SM]  198.01,87.46 180 top
R1  R-220-0805  [R0805]  205.01,66.38 0 top
R2  R-220-0805  [R0805]  191.18,66.6 0 top
R3  R-4K7-0805  [R0805]  37.62,60.45 270 top
R4  R-4K7-0805  [R0805]  39.41,60.45 270 top
R5  R-10K-0805  [R0805]  41.22,60.46 270 top
R6  R-390-0805  [R0805]  39.97,84.83 270 top
R7  R-10K-0805  [R0805]  36.35,84.83 90 top
R8  R-120-0805  [R0805]  56.69,62.56 0 top
R9  R-120-0805  [R0805]  56.81,59.62 0 top
R10  R-2K2-0805  [R0805]  22.3,96.49 270 top
R11  R-2K2-0805  [R0805]  24.11,96.51 270 top
R12  R-10-0805  [R0805]  5.87,105.95 270 top
R13  R-49R9-0805  [R0805]  19.22,105.9 90 top
R14  R-33-0805  [R0805]  21.03,105.9 270 top
R15  R-49R9-0805  [R0805]  24.64,105.9 90 top
R16  R-33-0805  [R0805]  22.82,105.9 270 top
R17  R-49R9-0805  [R0805]  10.25,105.93 270 top
R18  R-49R9-0805  [R0805]  15.63,105.93 270 top
R19  R-1M-0805  [R0805]  16.2,81.24 180 top
R20  R-10K-0805  [R0805]  24.37,86.98 0 top
R21  R-10K-0805  [R0805]  24.37,88.73 0 top
R22  R-10K-0805  [R0805]  24.39,90.5 0 top
R23  R-10K-0805  [R0805]  24.41,92.3 0 top
R24  R-10K-0805  [R0805]  24.37,85.19 0 top
R25  R-12K4-0805  [R0805]  12.1,96.48 270 top
R27  PTC  [R0805]  153.88,89 0 top
R29  R-4K7-0805  [R0805]  19.7,69.19 90 top
R30  R-1K5-0805  [R0805]  133.63,77.26 270 top
R31  R-1K5-0805  [R0805]  131.42,77.26 270 top
R32  R-1K5-0805  [R0805]  129.21,77.24 270 top
R33  R-1K5-0805  [R0805]  127.02,77.25 270 top
R34  R-1K-0805  [R0805]  127.29,63.32 90 top
R35  R-1K5-0805  [R0805]  129.64,63.34 90 top
R36  R-1K5-0805  [R0805]  131.92,63.3 90 top
R37  R-1K5-0805  [R0805]  134.18,63.27 90 top
R38  R-5K2-0805  [R0805]  136.66,68.43 180 top
R39  R-220-0805  [R0805]  15.42,37.65 90 top
R40  R-220-0805  [R0805]  25.19,37.46 90 top
R41  R-220-0805  [R0805]  34.77,37.55 90 top
R42  R-220-0805  [R0805]  45.07,37.55 90 top
R43  R-220-0805  [R0805]  60.04,37.88 90 top
R44  R-220-0805  [R0805]  69.91,37.8 90 top
R45  R-220-0805  [R0805]  79.83,37.95 90 top
R46  R-220-0805  [R0805]  89.8,38.04 90 top
R47  R-220-0805  [R0805]  36.58,106.01 270 top
R48  R-220-0805  [R0805]  41.83,106.08 270 top
R49  R-220-0805  [R0805]  47.25,106.1 270 top
R50  R-220-0805  [R0805]  52.78,106.08 270 top
R51  R-220-0805  [R0805]  73.95,105.36 270 top
R52  R-220-0805  [R0805]  89.12,105.41 270 top
R53  R-220-0805  [R0805]  103.78,105.35 270 top
R54  R-220-0805  [R0805]  103.99,37.95 90 top
R55  R-220-0805  [R0805]  137.04,38.25 90 top
R56  R-220-0805  [R0805]  168.06,36.94 90 top
R57  R-220-0805  [R0805]  178.99,37.06 90 top
R58  R-220-0805  [R0805]  188.98,37.13 90 top
R59  R-220-0805  [R0805]  198.86,37.04 90 top
R60  R-220-0805  [R0805]  209.4,36.98 90 top
R61  R-220-0805  [R0805]  219.25,37.75 90 top
R71  PTC  [R0805]  153.87,91.26 0 top
S1  SWT-10P  [42854232081X_10POS]  38.38,94.2 270 top
U1  LDO-5V-3V3  [NCV8165ML330TBG]  198.18,71.89 90 top
U2  STM32F103RB  [ST_MICROELECTRONICS_STM32F103RBT6_0]  40.02,73.49 180 top
U3  W5500  [WIZNET_W5500_0]  16.17,88.73 180 top
U4  DS18B20Z  [21-0041B_8_MXM]  24.01,65.52 180 top
U5  MAX-22199  [21-0140_T3255+6_MXM]  130.08,70.05 180 top
U$1  [RS485]  169.04,128.14 0 top
U$2  [LOGO-UKCA]  226.01,17.86 0 top
U$3  [CE-4MM]  226.03,27.25 0 top
U$4  [SS_SOLENOID]  11.42,23.78 0 top
U$5  [SS_SOLENOID]  21.42,23.78 0 top
U$6  [SS_SOLENOID]  31.42,23.78 0 top
U$7  [SS_SOLENOID]  41.42,23.78 0 top
U$8  [SS_SOLENOID]  165.05,23.78 0 top
U$9  [SS_P]  212.01,127.91 0 top
U$10  [SS_M]  217.01,127.91 0 top
U$11  [SS_M]  58.13,128.31 0 top
U$12  [SS_P]  222.17,127.91 0 top
U$13  [SS_M]  227.17,127.91 0 top
U$14  [SS_P]  68.63,127.78 0 top
U$15  [SS_CONTACTOR_180]  73.41,118.11 0 top
U$16  [SS_SOLSEN]  102.82,24.16 0 top
U$17  [SS_SOLSEN]  133.55,24.16 0 top
U$18  [SS_CONTACTOR_180]  103.63,118.11 0 top
U$19  [SS_CONTACTOR]  195.07,24.13 0 top
U$20  [LOGO-PATRIQ]  196.58,101.36 0 top
U$22  [SS_P]  201.85,127.91 0 top
U$23  [SS_P]  156.26,127.78 0 top
U$24  [SS_M]  161.01,127.78 0 top
U$25  [SS_M]  206.85,127.91 0 top
U$26  [SS_SOLENOID]  175.05,23.78 0 top
U$27  [SS_SOLENOID]  185.05,23.78 0 top
U$28  [SS_SOLENOID]  205.21,23.78 0 top
U$29  [SS_SOLENOID]  57.1,23.78 0 top
U$30  [SS_SOLENOID]  67.1,23.78 0 top
U$31  BASEBOARD_TOOLING  [_THL_VP]  118,5.2 0 top
U$32  [SS_SOLENOID]  77.1,23.78 0 top
U$33  [SS_SOLENOID]  87.1,23.78 0 top
U$34  [RS485]  189.1,128.27 0 top
U$35  [SS_P]  176.58,127.78 0 top
U$36  [SS_M]  181.33,127.78 0 top
U$37  [SS_CHECK]  83.44,127 0 top
U$38  [SS_P]  118.8,127.78 0 top
U$39  [SS_CONTACTOR_180]  88.65,118.11 0 top
U$40  [SS_CHECK]  98.42,126.87 0 top
U$41  [SS_CHECK]  113.54,127 0 top
U$42  [SS_SIG]  123.7,127.63 0 top
U$43  [SS_SERIAL_TAG]  227.33,92.71 270 top
Y1  QRZ-8MHZ  [4-SMD3.2X2.5MM,NOLEAD]  42.86,84.77 90 top
Y2  QRZ-25MHZ  [ECS2501836B2CTYTR]  16.13,77.66 270 top

## Library data of the parts
C1 C5 C7 = Softtec_SMD; VAL: 220uF
C2 C6 C16 C22 C24 C25 C27 C29-C31 C37 = Softtec_SMD; VAL: 1uF
C3 C4 C9-C11 C13 C14 C35 C36 C38-C40 C43-C45 = Softtec_SMD; VAL: 100nF
C8 C12 C23 C26 = Softtec_SMD; VAL: 18pF
C15 C32 C33 = Softtec_SMD; VAL: 10uF
C17 = Softtec_SMD; VAL: 1nF
C18 = Softtec_SMD; VAL: 22nF
C19 C28 = Softtec_SMD; VAL: 10nF
C20 C21 = Softtec_SMD; VAL: 68nF
C34 C46 = Softtec_SMD; VAL: 4.7uF
D1 D2 D6 D8 D10-D12 D16-D18 D22-D24 D27 D28 D32-D34 D38-D40 D43 D44 D48-D50 D54-D56 D59 = Softtec_SMD; VAL: Green
D3 = Softtec_SMD; VAL: Blue
D4 D5 D7 D9 = Softtec_SMD; VAL: Red
D13-D15 D19-D21 D25 D26 D29-D31 D35-D37 D41 D42 D45 D51-D53 D57 D58 D61 D62 D86 D87 D93 D94 J1 J4 J5 J7-J11 J14 S1 U1 U$1 U$2 U$4-U$20 U$22-U$43 = Softtec_SMD
F25 F26 = Softtec_SMD; DESCRIPTION: Resettable Fuses - PPTC Fuse; HEIGHT: 0.75mm; MANUFACTURER_NAME: Stewart Connector; MANUFACTURER_PART_NUMBER: 0ZCG0050AF2C; VAL: 1500mA
FB1 = Softtec_SMD; MANUFACTURER: Murata; PACKAGEREFERENCE: 0805; VAL: 120R/3000mA
IC1 = Softtec_SMD; DESCRIPTION: RS-422/RS-485 Interface IC 3.3V Powered, 10Mbps and Slew-Rate Limited, True RS-485/RS-422 Transceivers; HEIGHT: 1.75mm; MANUFACTURER_NAME: Maxim Integrated; MANUFACTURER_PART_NUMBER: MAX3486CSA+T
IC2-IC4 = Softtec_SMD; DESCRIPTION: MAXIM INTEGRATED PRODUCTS - MAX4896ETP+T - Relay/Load Driver, 8 Outputs, 2.7V to 5.5V Supply, 200mA Out, TQFN-EP-20; HEIGHT: 0.8mm; MANUFACTURER_NAME: Maxim Integrated; MANUFACTURER_PART_NUMBER: MAX4896ETP+T
J2 = Softtec_SMD; MANUFACTURER_PART_NUMBER: 8000072438; MFR_NAME: Weidmuller
J13 = Softtec_SMD; MANUFACTURER_PART_NUMBER: 2562970000; MFR_NAME: Weidmuller
J15 = Softtec_SMD; COPYRIGHT: Copyright (C) 2022 Ultra Librarian. All rights reserved.; MANUFACTURER_PART_NUMBER: 8000072470; MFR_NAME: Weidmuller
K1-K23 = Softtec_SMD; DESCRIPTION: 5 Volt Coil, DPDT Contacts, Fuly Sealed,; HEIGHT: 5mm; MANUFACTURER_NAME: Hongfa; MANUFACTURER_PART_NUMBER: HFD4/5-S
L1 = Softtec_SMD; DESCRIPTION: Power inductor SMD shielded 100uH Bourns SRR1280 Series Shielded Wire-wound SMD Inductor with a Ferrite Core, 100 uH +/-20% 2.1A Idc Q:18; HEIGHT: 10mm; MANUFACTURER_PART_NUMBER: SRR1210-101M
PS1 = Softtec_SMD; DESCRIPTION: 1 Amp POL switching regulator, 3.0 to -36 VDC input, pos.-pos. circuit, SMD package; HEIGHT: 7.6mm; MANUFACTURER_NAME: Traco Power; MANUFACTURER_PART_NUMBER: TSR 1-2450SM
R1 R2 R39-R61 = Softtec_SMD; VAL: 220
R3 R4 R29 = Softtec_SMD; VAL: 4.7k
R5 R7 R20-R24 = Softtec_SMD; VAL: 10k
R6 = Softtec_SMD; VAL: 390
R8 R9 = Softtec_SMD; VAL: 120
R10 R11 = Softtec_SMD; VAL: 2k2
R12 = Softtec_SMD; VAL: 10
R13 R15 R17 R18 = Softtec_SMD; VAL: 49,9
R14 R16 = Softtec_SMD; VAL: 33
R19 = Softtec_SMD; VAL: 1M
R25 = Softtec_SMD; VAL: 12k4
R27 R71 = rcl; SPICEPREFIX: R
R30-R33 R35-R37 = Softtec_SMD; VAL: 1k5
R34 = Softtec_SMD; VAL: 1k
R38 = Softtec_SMD; VAL: 5.2k
U2 = Softtec_SMD; DATASHEET: http://www.st.com/content/ccc/resource/technical/document/datasheet/33/d4/6f/1d/df/0b/4c/6d/CD00161566.pdf/files/CD00161566.pdf/jcr:content/translations/en.CD00161566.pdf; DIGIKEY_DESCRIPTION: IC MCU 32BIT 128KB FLASH 64LQFP; MF: ST Microelectronics; MPN: STM32F103RBT6; PACKAGE: LQFP-64
U3 = Softtec_SMD; COMPONENT_LINK_1_DESCRIPTION: Manufacturer URL; DATASHEET: http://wizwiki.net/wiki/lib/exe/fetch.php?media=products:w5500:w5500_ds_v106e_141230.pdf; MF: WIZnet; MPN: W5500; PACKAGE: LQFP-48; PACKAGE_DESCRIPTION: 48-Pin Low-profile Quad Flat Package, Body 7.00 x 7.00 mm, Pitch 0.50 mm
U4 = Softtec_SMD; MANUFACTURER_PART_NUMBER: DS18B20Z+; MFR_NAME: Maxim Integrated Products
U5 = Softtec_SMD; COPYRIGHT: Copyright (C) 2022 Ultra Librarian. All rights reserved.; MANUFACTURER_PART_NUMBER: MAX22199ATJ+; MFR_NAME: Maxim Integrated Products
U$3 = logo
Y1 = Softtec_SMD; VAL: 8MHz
Y2 = Softtec_SMD; MANUFACTURER_PART_NUMBER: ECS-250-18-36B2-CTY-TR; VAL: 25MHz

## Nets
1V2O [OUT+]: C28.1 U3.22
24V_1 [OUT+]: F25.1 J15.1 J15.11
24V_2 [OUT+]: F26.1 J4.3 J5.3
+3V3 [OUT+]: C5.1 C6.1 C9.1 C10.1 C11.1 C13.1 C14.1 C15.1 C31.1 C32.1 C35.1 C36.1 C37.1 C38.1 C39.1 C40.1 C43.2 C45.1 C46.1 D1.A FB1.2 IC1.8 IC2.19 IC3.19 IC4.19 J10.1 J11.12 J11.14 R3.2 R4.2 R5.2 R7.2 R12.2 R13.2 R15.2 R20.2 R21.2 R22.2 R23.2 R24.2 R29.2 U1.1 U2.1 U2.13 U2.19 U2.32 U2.48 U2.64 U3.28 U4.3 U5.16 U5.28 U5.29 U5.31
+5V [OUT+]: C2.1 C4.1 C7.1 C44.1 D2.A D16.A D17.A D18.A D22.A D23.A D24.A D27.A D28.A D32.A D33.A D34.A D38.A D39.A D40.A D43.A D44.A D48.A D49.A D50.A D54.A D55.A D56.A D59.A K1.1 K2.1 K3.1 K4.1 K5.1 K6.1 K7.1 K8.1 K9.1 K10.1 K11.1 K12.1 K13.1 K14.1 K15.1 K16.1 K17.1 K18.1 K19.1 K20.1 K21.1 K22.1 K23.1 L1.2 U1.5 U1.8
+24V [OUT+]: C1.1 C3.1 F25.2 F26.2 J1.1 J1.5 J2.1 J2.3 PS1.1
ACTLED [OUT+]: R10.2 U3.27
ADC1 [OUT+]: U2.26
ADC2 [OUT+]: U2.27
AVDD [OUT+]: C22.1 C24.1 C25.1 C27.1 C29.1 C30.1 C33.1 FB1.1 U3.4 U3.8 U3.11 U3.15 U3.17 U3.21
COUNTER1_SIG [OUT+]: U2.9
COUNTER2_SIG [OUT+]: U2.10
EXRES1 [OUT+]: R25.2 U3.10
GND [OUT+]: C1.2 C2.2 C3.2 C4.2 C5.2 C6.2 C7.2 C8.2 C9.2 C10.2 C11.2 C12.2 C13.2 C14.2 C15.2 C16.2 C17.1 C18.1 C19.2 C22.2 C23.2 C24.2 C25.2 C26.2 C27.2 C28.2 C29.2 C30.2 C31.2 C32.2 C33.2 C34.2 C35.2 C36.2 C37.2 C38.2 C39.2 C40.2 C43.1 C44.2 C45.2 C46.2 D3.C D4.C D5.C D6.C D7.C D8.C D9.C D10.C D11.C D12.C D13.A D14.A D15.A D19.A D20.A D21.A D25.A D26.A D29.A D30.A D31.A D35.A D36.A D37.A D41.A D42.A D45.A D51.A D52.A D53.A D57.A D58.A D61.A D62.A D86.A D87.A D93.A D94.A IC1.5 IC2.6 IC2.7 IC2.10 IC2.13 IC2.16 IC2.21 IC3.6 IC3.7 IC3.10 IC3.13 IC3.16 IC3.21 IC4.6 IC4.7 IC4.10 IC4.13 IC4.16 IC4.21 J1.2 J1.6 J2.2 J2.4 J10.3 J10.5 J10.7 J10.9 J11.8 J13.1 PS1.7 PS1.9 R1.1 R2.1 R25.1 R38.1 S1.C1 S1.C2 U1.4 U1.9 U2.12 U2.18 U2.31 U2.47 U2.60 U2.63 U3.3 U3.9 U3.14 U3.16 U3.19 U3.29 U3.48 U4.5 U5.25 U5.26 U5.32 U5.33 Y1.2 Y1.4 Y2.2 Y2.4
GNDI [OUT+]: C17.2 J11.15 J11.16
IN_!FAULT! [OUT+]: R3.1 U2.37 U5.14
IN_!LATCH! [OUT+]: U2.39 U5.12
IN_!READY! [OUT+]: R4.1 U2.38 U5.15
INPUT1 [OUT+]: J15.4 R30.1
INPUT1_LED [OUT+]: D5.A U5.2
INPUT2 [OUT+]: J15.7 R31.1
INPUT2_LED [OUT+]: D7.A U5.4
INPUT3 [OUT+]: J15.10 R32.1
INPUT3_LED [OUT+]: D9.A U5.6
INPUT4 [OUT+]: J15.12 R33.1
INPUT4_LED [OUT+]: D11.A U5.8
INPUT5 [OUT+]: J4.4 R34.1
INPUT5_LED [OUT+]: D6.A U5.17
INPUT6 [OUT+]: J4.5 R35.1
INPUT6_LED [OUT+]: D8.A U5.19
INPUT7 [OUT+]: J5.4 R36.1
INPUT7_LED [OUT+]: D10.A U5.21
INPUT8 [OUT+]: J5.5 R37.1
INPUT8_LED [OUT+]: D12.A U5.23
JTCK/SWCLK [OUT+]: J10.4 U2.49
JTDI [OUT+]: J10.8 U2.50
JTDO [OUT+]: J10.6 U2.55
JTMS/SWDIO [OUT+]: J10.2 U2.46
LED_ACT [OUT+]: R8.1 U2.62
LED_ERROR [OUT+]: R9.1 U2.61
LINKLED [OUT+]: R11.2 U3.25
N$1 [OUT+]: R38.2 U5.27
N$2 [OUT+]: IC1.7 R71.1
N$3 [OUT+]: D48.C R55.1
N$4 [OUT+]: D54.C R58.1
N$5 [OUT+]: D17.C R40.1
N$6 [OUT+]: D59.C R61.1
N$7 [OUT+]: D55.C R59.1
N$10 [OUT+]: D2.C R2.2
N$11 [OUT+]: D22.C R42.1
N$12 [OUT+]: D27.C R45.1
N$13 [OUT+]: D50.C R57.1
N$14 [OUT+]: D23.C R43.1
N$15 [OUT+]: D28.C R46.1
N$16 [OUT+]: D18.C R41.1
N$17 [OUT+]: D24.C R44.1
N$18 [OUT+]: D56.C R60.1
N$19 [OUT+]: IC1.6 R27.1
N$20 [OUT+]: D49.C R56.1
N$21 [OUT+]: R30.2 U5.1
N$22 [OUT+]: R31.2 U5.3
N$23 [OUT+]: R32.2 U5.5
N$24 [OUT+]: R33.2 U5.7
N$25 [OUT+]: R34.2 U5.18
N$26 [OUT+]: R35.2 U5.20
N$27 [OUT+]: R36.2 U5.22
N$28 [OUT+]: R37.2 U5.24
N$30 [OUT+]: D32.C R47.1
N$31 [OUT+]: D38.C R50.1
N$32 [OUT+]: D43.C R53.1
N$33 [OUT+]: C12.1 R6.1 Y1.3
N$34 [OUT+]: D39.C R51.1
N$35 [OUT+]: D44.C R54.1
N$36 [OUT+]: D34.C R49.1
N$37 [OUT+]: D40.C R52.1
N$38 [OUT+]: D33.C R48.1
N$39 [OUT+]: D16.C R39.1
N$45 [OUT+]: D1.C R1.2
N$55 [OUT+]: PS1.10
N$56 [OUT+]: PS1.6
N$61 [OUT+]: C19.1 J11.5 R17.1 R18.1
N$64 [OUT+]: J11.7
N$65 [OUT+]: U3.47
N$66 [OUT+]: U3.46
N$67 [OUT+]: U3.13
N$68 [OUT+]: U3.12
N$70 [OUT+]: J11.11 R10.1
N$71 [OUT+]: J11.13 R11.1
N$76 [OUT+]: L1.1 PS1.5
N$97 [OUT+]: D3.A R8.2
N$98 [OUT+]: D4.A R9.2
NET_G4 [OUT+]: C18.2 J11.2 R12.1
NET_ID0 [OUT+]: S1.1 U2.2
NET_ID1 [OUT+]: S1.2 U2.3
NET_ID2 [OUT+]: S1.4 U2.4
NET_ID3 [OUT+]: S1.8 U2.8
NET_R+ [OUT+]: C20.2 J11.4
NET_R- [OUT+]: C21.2 J11.6
NET_T+ [OUT+]: J11.1 R14.1
NET_T- [OUT+]: J11.3 R16.1
NRST [OUT+]: C16.1 J10.10 R7.1 U2.7
OSCIN [OUT+]: C8.1 U2.5 Y1.1
OSCOUT [OUT+]: R6.2 U2.6
OSR1_OUT [OUT+]: IC2.5 IC3.3
OSR1_OUT1 [OUT+]: IC2.18 K1.8 R39.2
OSR1_OUT2 [OUT+]: IC2.17 K2.8 R40.2
OSR1_OUT3 [OUT+]: IC2.15 K3.8 R41.2
OSR1_OUT4 [OUT+]: IC2.14 K4.8 R42.2
OSR1_OUT5 [OUT+]: IC2.12 K5.8 R43.2
OSR1_OUT6 [OUT+]: IC2.11 K6.8 R44.2
OSR1_OUT7 [OUT+]: IC2.9 K7.8 R45.2
OSR1_OUT8 [OUT+]: IC2.8 K8.8 R46.2
OSR2_OUT [OUT+]: IC3.5 IC4.3
OSR2_OUT1 [OUT+]: IC3.18 K9.8 R47.2
OSR2_OUT2 [OUT+]: IC3.17 K10.8 R48.2
OSR2_OUT3 [OUT+]: IC3.15 K11.8 R49.2
OSR2_OUT4 [OUT+]: IC3.14 K12.8 R50.2
OSR2_OUT5 [OUT+]: IC3.12 K13.8 R51.2
OSR2_OUT6 [OUT+]: IC3.11 K14.8 R52.2
OSR2_OUT7 [OUT+]: IC3.9 K15.8 R53.2
OSR2_OUT8 [OUT+]: IC3.8 K16.8 R54.2
OSR3_OUT1 [OUT+]: IC4.18 K17.8 R55.2
OSR3_OUT2 [OUT+]: IC4.17 K18.8 R56.2
OSR3_OUT3 [OUT+]: IC4.15 K19.8 R57.2
OSR3_OUT4 [OUT+]: IC4.14 K20.8 R58.2
OSR3_OUT5 [OUT+]: IC4.12 K21.8 R59.2
OSR3_OUT6 [OUT+]: IC4.11 K22.8 R60.2
OSR3_OUT7 [OUT+]: IC4.9 K23.8 R61.2
OSR3_OUT8 [OUT+]: IC4.8
OUT1 [OUT+]: D26.C J7.1 K1.4
OUT2 [OUT+]: D15.C J7.3 K2.4
OUT3 [OUT+]: D14.C J7.5 K3.4
OUT4 [OUT+]: D25.C J7.7 K4.4
OUT5 [OUT+]: D19.C J8.1 K5.4
OUT6 [OUT+]: D13.C J8.3 K6.4
OUT7 [OUT+]: D21.C J8.5 K7.4
OUT8 [OUT+]: D20.C J8.7 K8.4
OUT9 [OUT+]: D29.C J14.1 K9.4
OUT10 [OUT+]: D58.C J14.2 K10.4
OUT11 [OUT+]: D41.C J14.3 K11.4
OUT12 [OUT+]: D30.C J14.4 K12.4
OUT13 [OUT+]: D36.C J15.2 K13.4
OUT14 [OUT+]: D37.C J15.5 K14.4
OUT15 [OUT+]: D31.C J15.8 K15.4
OUT16 [OUT+]: D35.C J4.1 K16.4
OUT17 [OUT+]: D42.C J5.1 K17.4
OUT18 [OUT+]: D52.C J9.1 K18.4
OUT19 [OUT+]: D53.C J9.3 K19.4
OUT20 [OUT+]: D45.C J9.5 K20.4
OUT21 [OUT+]: D51.C J9.7 K21.4
OUT22 [OUT+]: D57.C J9.9 K22.4
OUT23-3 [OUT+]: J9.11 K23.3
OUT23-4 [OUT+]: J9.12 K23.4
OUT+: J2.5 K1.3 K2.3 K3.3 K4.3 K5.3 K6.3 K7.3 K8.3 K9.3 K10.3 K11.3 K12.3 K13.3 K14.3 K15.3 K16.3 K17.3 K18.3 K19.3 K20.3 K21.3 K22.3
OUT- [OUT+]: J2.6 J4.2 J5.2 J7.2 J7.4 J7.6 J7.8 J8.2 J8.4 J8.6 J8.8 J9.2 J9.4 J9.6 J9.8 J9.10 J14.5 J15.3 J15.6 J15.9
OUT_!FLAG! [OUT+]: IC2.20 IC3.20 IC4.20 R5.1 U2.43
OUT_!RESET! [OUT+]: IC2.1 IC3.1 IC4.1 U2.41
PMODE0 [OUT+]: R23.1 U3.45
PMODE1 [OUT+]: R22.1 U3.44
PMODE2 [OUT+]: R21.1 U3.43
RS485_A+ [OUT+]: D61.C D86.C D94.C J1.3 J1.7 J13.3 J13.5 R27.2
RS485_B- [OUT+]: D62.C D87.C D93.C J1.4 J1.8 J13.4 J13.6 R71.2
RS485_DIR [OUT+]: IC1.2 IC1.3 U2.11
RS485_DIR_SL1 [OUT+]: U2.28
RS485_RX [OUT+]: IC1.1 U2.17
RS485_RX_SL1 [OUT+]: U2.30
RS485_TX [OUT+]: IC1.4 U2.16
RS485_TX_SL1 [OUT+]: U2.29
RX_N [OUT+]: C21.1 R18.2 U3.5
RX_P [OUT+]: C20.1 R17.2 U3.6
SPI1_!CS!_NET [OUT+]: U2.24 U3.32
SPI1_MISO [OUT+]: U2.22 U3.34
SPI1_MOSI [OUT+]: U2.23 U3.35
SPI1_SCK [OUT+]: U2.21 U3.33
SPI2_!CS!_INP1 [OUT+]: U2.40 U5.9
SPI2_!CS!_INP2 [OUT+]: U2.51
SPI2_!CS!_OUT [OUT+]: IC2.2 IC3.2 IC4.2 U2.42
SPI2_!CS!_TMP [OUT+]: U2.59
SPI2_MISO [OUT+]: IC4.5 U2.35 U5.13
SPI2_MOSI [OUT+]: IC2.3 U2.36 U5.11
SPI2_SCK [OUT+]: IC2.4 IC3.4 IC4.4 U2.34 U5.10
SWB_TEMPS [OUT+]: R29.1 U2.57 U4.4
TMP1_DRDY [OUT+]: U2.58
TOCAP [OUT+]: C34.1 U3.20
TX_N [OUT+]: R15.1 R16.2 U3.1
TX_P [OUT+]: R13.1 R14.2 U3.2
USB_DM [OUT+]: U2.45
USB_DP [OUT+]: U2.44
W5500_!INT! [OUT+]: R24.1 U2.25 U3.36
W5500_!RST! [OUT+]: R20.1 U2.20 U3.37
XI [OUT+]: C23.1 R19.2 U3.30 Y2.1
XO [OUT+]: C26.1 R19.1 U3.31 Y2.3